# Altium PCB PCB_WIFI远程电脑开机卡.pcbdoc
Units mil, origin at the board's own origin, x right, y up, seen from the top; angles counter-clockwise.
Board outline 3435 x 2337.8 mil, 2 copper layers (Top Layer, Bottom Layer); 36 components, 33 nets, 143 pads, 47 vias.
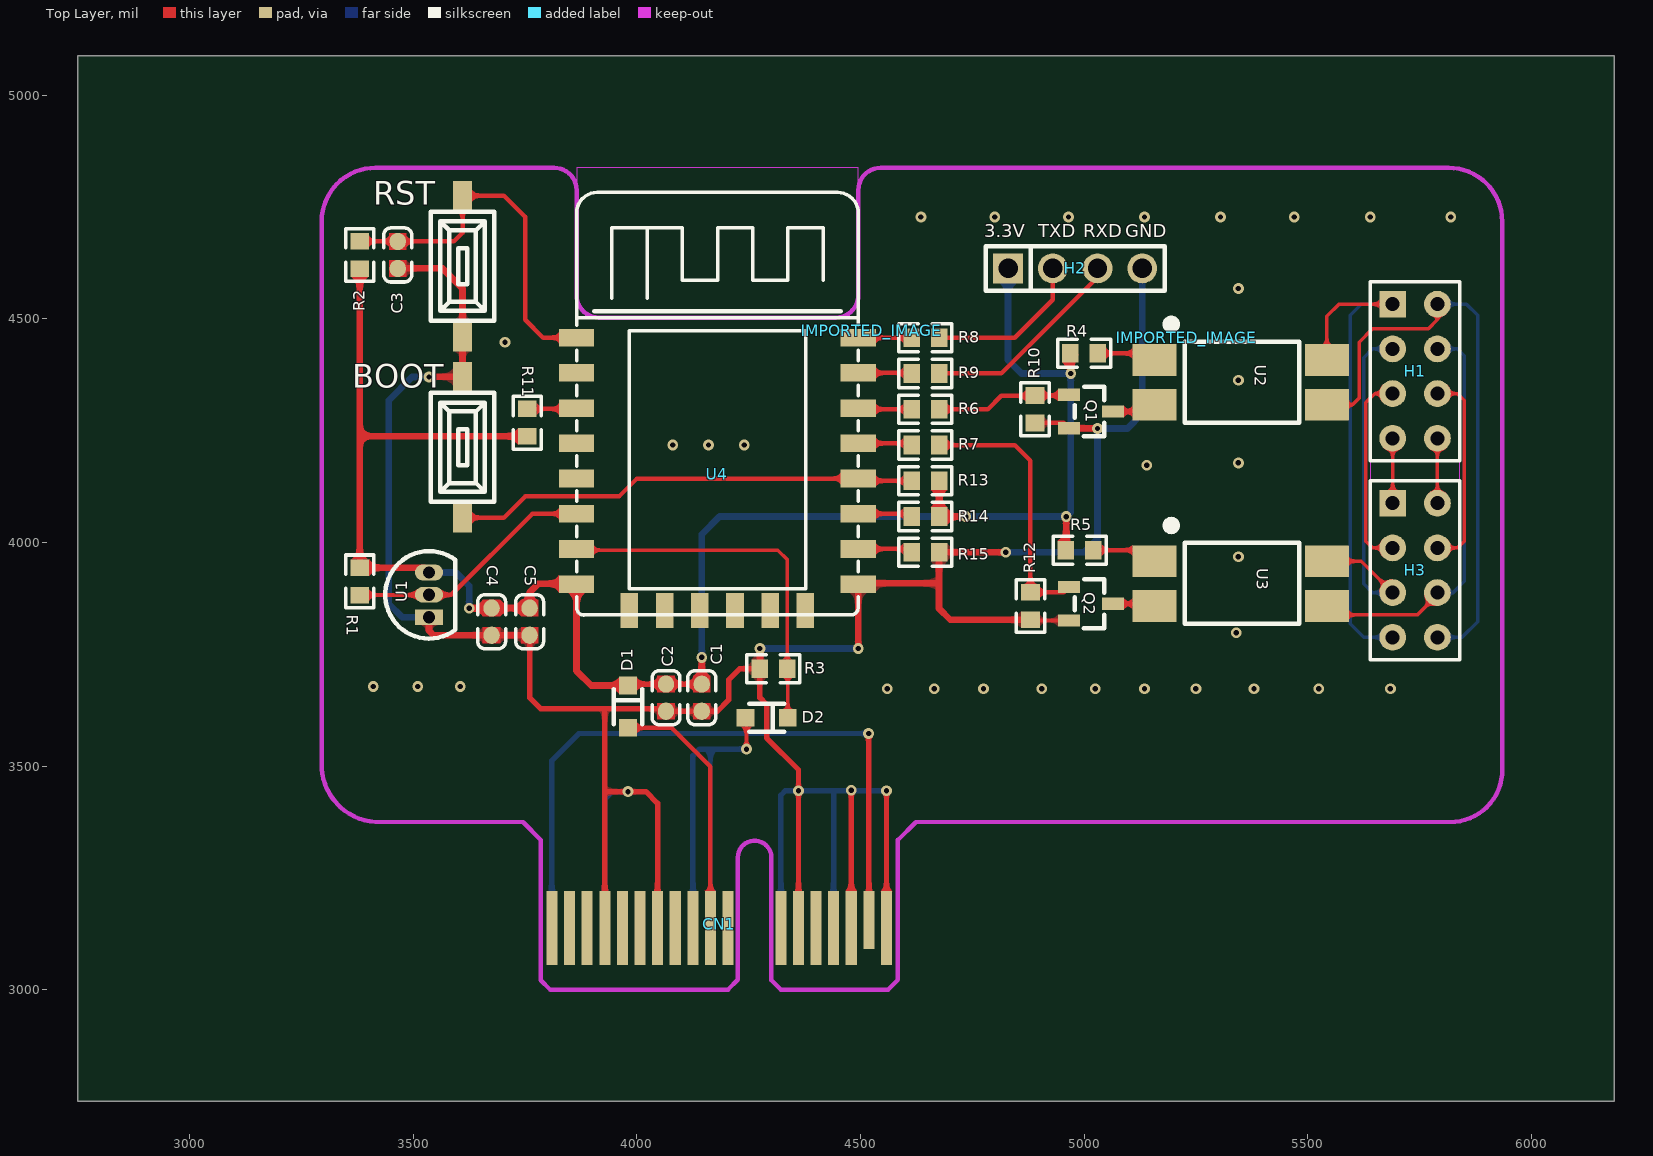
[diagram p0: Top Layer view]
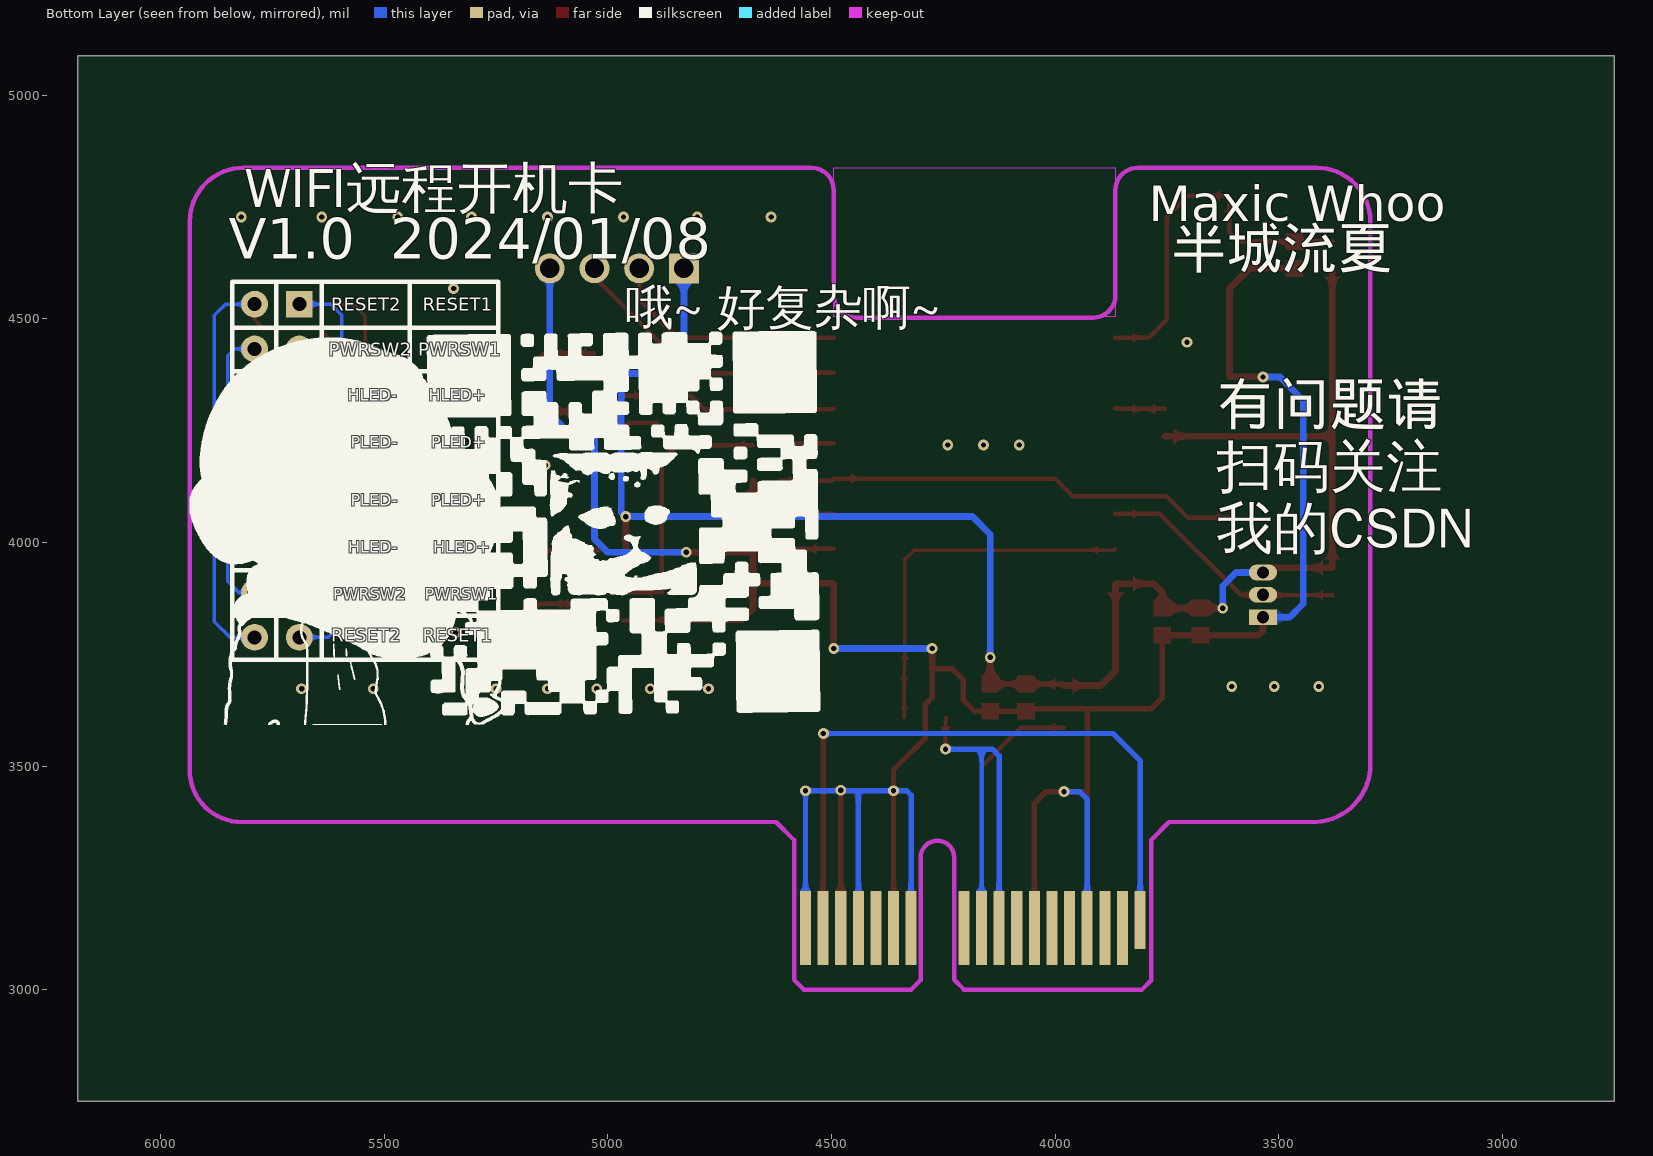
[diagram p1: Bottom Layer view, seen from below]

## Layer stack, top to bottom
Top Layer: signal copper (thickness not stored)
Dielectric: dielectric 12.6, FR-4, Dk 4.8
Bottom Layer: signal copper (thickness not stored)

## Board outline
6185,2750 2750,2750 2750,5087.8 6185,5087.8

## Components (designator, comment, footprint, x,y, rotation, side; value= is the part's Value field where it differs from the comment)
BOOT "BOOT" 轻触开关 3610,4212.8 r90 top
C1 "10uF/10V" "C  0603" 4145,3652.8 r90 top
C2 "100nF/50V" "C  0603" 4065,3652.8 r90 top
C3 "100nF/50V" "C  0603" 3465,4642.8 r90 top
C4 "10uF/25V" "C  0603" 3675,3822.8 r90 top
C5 "100nF/50V" "C  0603" 3760,3822.8 r90 top
CN1 "PCIE-36P" "PCIE 1X" 3810,3137.8 r0 top
D1 "CUS10S30" SOD-323 3980,3632.8 r270 top
D2 "CUS10S30" SOD-323 4290,3607.8 r180 top
H1 "机箱接线端子" 排针排母2*4P 5740,4382.8 r0 top
H2 "A2541WV-4P" HDR-TH_4P-P2.54-V-M 4980,4612.8 r0 top
H3 "主板接线端子" 排针排母2*4P 5740,3937.8 r0 top
IMPORTED_IMAGE "IMPORTED_IMAGE" IMPORTED_IMAGE 5230,4457.8 r0 top
IMPORTED_IMAGE "IMPORTED_IMAGE" IMPORTED_IMAGE 4525,4472.8 r0 top
Q1 "S8050" SOT-23-3 5015,4292.8 r270 top
Q2 "S8050" SOT-23-3 5015,3862.8 r270 top
R1 "10K" "R 0603" 3380,3912.8 r90 top
R2 "10k" "R 0603" 3380,4642.8 r90 top
R3 "4.7K" "R 0603" 4305,3717.8 r180 top
R4 "300R" "R 0603" 5000,4422.8 r0 top
R5 "300R" "R 0603" 4990,3982.8 r0 top
R6 "100R" "R 0603" 4645,4297.8 r0 top
R7 "100R" "R 0603" 4645,4217.8 r0 top
R8 "300R/1%" "R 0603" 4645,4457.8 r180 top
R9 "300R/1%" "R 0603" 4645,4377.8 r180 top
R10 "10K" "R 0603" 4890,4297.8 r270 top
R11 "10k" "R 0603" 3755,4267.8 r270 top
R12 "10K" "R 0603" 4880,3857.8 r270 top
R13 "10k" "R 0603" 4645,4137.8 r0 top
R14 "10k" "R 0603" 4645,4057.8 r180 top
R15 "10k" "R 0603" 4645,3977.8 r180 top
RST "RESET" 轻触开关 3610,4617.8 r270 top
U1 "DS18B20+" TO-92-3_L4.9-W3.7-P1.27-L 3535,3882.8 r90 top
U2 "PS2501-1XSM" SOP-4_L6.5-W4.6-P2.54-LS10.2-BL 5350,4357.8 r270 top
U3 "PS2501-1XSM" SOP-4_L6.5-W4.6-P2.54-LS10.2-BL 5350,3907.8 r270 top
U4 "E-ESP-12F" J-ESP-12F 4175,4267.8 r0 top

## Footprints (in the part's own frame and the unit in brackets; to place one, negate y for a bottom-side part, rotate by r counter-clockwise, add the part's x,y. Pads: shape width x height; smd on the part's side, far side on the other; paste and mask are expansions set on the pad)
"C  0603" [mil]
  oval 38.58x36.61 smd: 1(-30.31,0) 2(30.32,0)
  Top Layer region: -48.62,19.29 -12.01,19.29 -12.01,-19.29 -48.62,-19.29
  Top Layer region: 12.01,19.29 48.62,19.29 48.62,-19.29 12.01,-19.29
  silkscreen extent -60,-31 60,31
HDR-TH_4P-P2.54-V-M [mm]
  rect 1.7x1.7 hole 1.1: 1(-3.81,0)
  round 1.7 hole 1.1: 2(-1.27,0) 3(1.27,0) 4(3.81,0)
  silkscreen extent -5.08,-1.27 5.08,1.27
IMPORTED_IMAGE [mil]
J-ESP-12F [mm]
  rect 2x1 smd: 1(-7.874,4.826) 2(-7.874,2.826) 3(-7.874,0.826) 4(-7.874,-1.174) 5(-7.874,-3.174) 6(-7.874,-5.174) 7(-7.874,-7.174) 8(-7.873,-9.174) 15(8.126,-9.174) 16(8.127,-7.174) 17(8.129,-5.174) 18(8.128,-3.174) 19(8.127,-1.174) 20(8.128,0.826) 21(8.128,2.826) 22(8.128,4.826)
  rect 1x2 smd: 9(-4.872,-10.675) 10(-2.875,-10.674) 11(-0.876,-10.674) 12(1.125,-10.674) 13(3.124,-10.674) 14(5.124,-10.675)
  silkscreen extent -7.87,-10.92 8.13,13.08
"PCIE 1X" [mm]
  rect 0.63x3.3 smd far side: A1(0,0.45)
  rect 0.63x4.2 smd far side: A2(1,0) A3(2,0) A4(3,0) A5(4,0) A6(5,0) A7(6,0) A8(7,0) A9(8,0) A10(9,0) A11(10,0) A12(13,0) A13(14,0) A14(15,0) A15(16,0) A16(17,0) A17(18,0) A18(19,-0.01)
  rect 0.63x4.2 smd: B1(0,0) B2(1,0) B3(2,0) B4(3,0) B5(4,0) B6(5,0) B7(6,0) B8(7,0) B9(8,0) B10(9,0) B11(10,0) B12(13,0) B13(14,0) B14(15,0) B15(16,0) B16(17,0) B18(19,-0.01)
  rect 0.63x3.3 smd: B17(18,0.45)
  Board Outline Layer lines w0.254: -0.635,-2.974 -0.635,4.996 ; -0.635,-2.974 -0.635,4.996 ; -0.635,-2.974 -0.109,-3.5 ; -0.635,-2.974 -0.109,-3.5 ; -0.635,4.996 -1.638,5.997 -0.635,4.996 ; -0.109,-3.5 10,-3.5 ; -0.109,-3.5 10,-3.5 ; 10,-3.5 10.559,-2.941 ; 10,-3.5 10.559,-2.941 ; 10.559,-2.941 10.559,4 10.559,-2.941 ; 12.461,-2.959 12.461,4 12.461,-2.959 ; 12.461,-2.959 13,-3.5 ; 12.461,-2.959 13,-3.5 ; 13,-3.5 19.101,-3.5 ; 13,-3.5 19.101,-3.5 ; 19.101,-3.5 19.649,-2.949 ; 19.101,-3.5 19.649,-2.949 ; 19.649,-2.949 19.649,4.999 ; 19.649,-2.949 19.649,4.999 ; 19.649,4.999 20.66,5.999 19.649,4.999 ; 10.56,4.01 cw(c11.51,4.01) 12.46,4.01 ccw(c11.51,4.01) 10.56,4.01
"R 0603" [mm]
  rect 0.94x1.06 smd: 1(-0.78,0) 2(0.78,0)
  silkscreen extent -1.5,-0.8 1.5,0.8
SOD-323 [mm]
  rect 1x1 smd: 1(-1.2,0) 2(1.2,0)
  silkscreen extent -1,-0.8 1,0.8
SOP-4_L6.5-W4.6-P2.54-LS10.2-BL [mm]
  rect 1.8x2.5 smd: 1(-1.27,-4.9) 2(1.27,-4.9) 3(1.27,4.9) 4(-1.27,4.9)
  silkscreen extent -3.79,-4.42 2.29,3.32
SOT-23-3 [mm]
  rect 0.7x1.25 smd: 1(-0.95,-1.25) 2(0.95,-1.25) 3(0,1.25)
  silkscreen extent -1.4,-0.9 1.4,0.76
TO-92-3_L4.9-W3.7-P1.27-L [mm]
  rect 0.9x1.6 hole 0.7: 1(-1.27,0)
  oval 0.9x1.6 hole 0.7: 2(0,0) 3(1.27,0)
  silkscreen extent -2.48,-1.5 2.48,2.48
排针排母2*4P [mm]
  rect 1.52x1.52 hole 0.8: 1(-1.27,3.81)
  round 1.52 hole 0.8: 2(1.27,3.81) 3(-1.27,1.27) 4(1.27,1.27) 5(-1.27,-1.27) 6(1.27,-1.27) 7(-1.27,-3.81) 8(1.27,-3.81)
  silkscreen extent -2.54,-5.08 2.54,5.08
轻触开关 [mm]
  rect 1.7x1.1 smd: 1(-4,0) 2(4,0)
  silkscreen extent -3.1,-1.8 3.1,1.8

## Via types
v1: diameter 24, hole 12, Top Layer to Bottom Layer, 47 vias

## Nets (pads, with @x,y where several pads share a name; then routed paths per layer and width w, separated by ;. In a path a pad name is that pad's centre, name@x,y a point inside that pad or via, vN(x,y) a via of type N, cw(c..) or ccw(c..) an arc to the next point about the centre after c; other vN are vias at no path point)
3.3AUX: CN1.B10 D1.2 | length 581
  Top Layer w10: D1.2 4077.2,3585.6 4164.3,3498.5 CN1.B10
3.3V: CN1.A9 CN1.A10 D2.2 | length 982.1
  Top Layer w10: D2.2 4245,3605.6 v1(4245,3537.8)
  Bottom Layer w10: CN1.A10 4164.33,3537.8
  Bottom Layer w12: CN1.A9 4124.96,3522.76 4140,3537.8 4164.33,3537.8 v1(4245,3537.8)
3V3: C1.2 C2.2 C4.2 C5.2 D1.1 H2.1 R1.2 R2.1 R4.1 R5.1 R11.2 R13.2 R14.1 U1.3 U4.8 | length 4235
  Top Layer w12: D1.1 3983.1,3683.1 C2.2 C1.2
  Top Layer w15: R2.1 3380,4238 ; U1.3 3524.3,3943.5 R1.2 3380,4238 ; v1(3625,3852.8) C4.2 C5.2 3760,3887.8 3780,3907.8 3863.8,3907.8 U4.8 3865,3712.8 3897.8,3680 D1.1 ; R11.2 3380,4238 ; C1.2 v1(4145,3742.8) ; R13.2 R14.1 v1(4735,4057.8) ; R5.1 4960,3983.5 v1(4960,4057.8) ; R4.1 v1(4970,4377.8)
  Bottom Layer w15: U1.3 3595,3932.8 3625,3902.8 v1(3625,3852.8) ; v1(4145,3742.8) 4145,4017.8 4185,4057.8 v1(4735,4057.8) v1(4960,4057.8) 4970,4067.8 v1(4970,4377.8) 4860,4377.8 4830,4407.8 H2.1
$1N127: R11.1 U4.3 | length 110.7
  Top Layer w10: R11.1 3863.18,4298.51 U4.3
$1N146: R9.2 U4.21 | length 119.8
  Top Layer w10: U4.21 4613.03,4379.06 R9.2
$1N175: R8.2 U4.22 | length 119.3
  Top Layer w10: U4.22 R8.2
$1N180: R14.2 U4.17 | length 121.9
  Top Layer w10: U4.17 4607.99,4064.1 R14.2
$1N181: R15.2 U4.16 | length 122.4
  Top Layer w10: U4.16 4606.73,3985.36 R15.2
$1N314: Q2.1 R7.2 R12.1 | length 603.7
  Top Layer w10: R7.2 4845,4217.8 4880,4182.8 R12.1 4954.11,3888.51 Q2.1
$1N331: Q1.1 R6.2 R10.1 | length 303.5
  Top Layer w10: R6.2 4785,4297.8 4815,4327.8 4889.29,4327.8 R10.1 4964.11,4328.51 Q1.1
$1N466: R4.2 U2.1 | length 132.6
  Top Layer w10: R4.2 5142.09,4422.8 U2.1
$1N467: Q1.3 U2.2 | length 99.1
  Top Layer w10: Q1.3 5142.09,4292.8 U2.2
$1N468: R5.2 U3.1 | length 146.7
  Top Layer w10: R5.2 5132.09,3982.8 U3.1
$1N469: Q2.3 U3.2 | length 95
  Top Layer w10: Q2.3 5152.09,3862.8 U3.2
BOOT: BOOT.1 R13.1 U4.18 | length 1042.6
  Top Layer w10: BOOT.1 3702.5,4055.3 3750,4102.8 3960,4102.8 4000,4142.8 U4.18 4500,4137.8 R13.1
DQ: R1.1 U1.2 U4.6 | length 560.1
  Top Layer w10: R1.1 U1.2 3585,3882.8 3766.3,4064.1 U4.6
ESP-RST: C3.2 R2.2 RST.1 U4.1 | length 841.9
  Top Layer w10: R2.2 C3.2 3590.3,4673.1 3610,4692.8 RST.1 3702.5,4775.3 3750,4727.8 3750,4497.8 3790,4457.8 U4.1
GND: BOOT.2 C1.1 C2.1 C3.1 C4.1 C5.1 CN1.A4 CN1.A12 CN1.A15 CN1.A18 CN1.B4 CN1.B7 CN1.B13 CN1.B16 CN1.B18 H2.4 Q1.2 Q2.2 R3.2 R10.2 R12.2 R15.1 RST.2 U1.1 U4.15 | length 7938.8
  Top Layer w10: R12.2 4881.7,3825.4 Q2.2 ; R10.2 4954.1,4267.1 Q1.2
  Top Layer w12: C5.1 3760,3652.8 3785,3627.8 3928,3627.8 ; CN1.B4 3928,3137.91 3928,3627.8 ; 3928.1,3442.8 v1(3980,3442.8) 4020,3442.8 4046.22,3416.58 CN1.B7 ; CN1.B13 v1(4361.2,3444.8) 4361.2,3491.6 4290,3562.8 4290,3637.8 4275,3652.8 R3.2 4230,3717.8 4205,3692.8 4205,3647.8 4179.7,3622.5 C1.1 C2.1 4059.7,3627.8 3928,3627.8 ; CN1.B16 v1(4479.29,3445.8) ; CN1.B18 v1(4558.03,3444.77)
  Top Layer w15: C3.1 3565,4612.8 3610,4567.8 RST.2 3610,4413.8 BOOT.2 v1(3535,4369.8) ; U1.1 3535,3802.8 3545.3,3792.5 C4.1 C5.1 ; R3.2 v1(4275,3762.8) ; v1(4495,3762.8) U4.15 4497.1,3908.8 4675.7,3908.8 ; v1(4825,3977.8) R15.1 4675.7,3852.1 4700.7,3827.1 R12.2 ; Q1.2 v1(5030,4254.8)
  Bottom Layer w12: CN1.A4 3928.11,3425.91 3945,3442.8 v1(3980,3442.8) ; CN1.A12 4321.8,3434.6 4332,3444.8 v1(4361.2,3444.8) 4439.82,3444.8 ; CN1.A15 4439.92,3444.7 4439.82,3444.8 ; CN1.A18 v1(4558.03,3444.77) 4439.82,3444.8
  Bottom Layer w15: U1.1 3475,3832.8 3445,3862.8 3445,4317.8 3497,4369.8 v1(3535,4369.8) ; v1(4275,3762.8) v1(4495,3762.8) ; v1(4825,3977.8) 5000,3977.8 5030,4007.8 v1(5030,4254.8) 5097,4254.8 5130,4287.8 H2.4
  other v1: 4560,3672.8 4665,3672.8 4775,3672.8 4905,3672.8 5025,3672.8 5135,3672.8 5250,3672.8 5380,3672.8 5525,3672.8 5685,3672.8 3410,3677.8 3510,3677.8 3605,3677.8 5340,3797.8 5345,3967.8 5140,4172.8 5345,4177.8 4080,4217.8 4160,4217.8 4240,4217.8 5345,4362.8 3705,4447.8 5345,4567.8 4635,4727.8 4800,4727.8 4965,4727.8 5135,4727.8 5305,4727.8 5470,4727.8 5640,4727.8 5820,4727.8
GPIO4: R7.1 U4.19 | length 120.9
  Top Layer w10: U4.19 4610.5,4221.6 R7.1
GPIO5: R6.1 U4.20 | length 120.3
  Top Layer w10: U4.20 4497.5,4297.8 R6.1
GPIO13: D2.1 R3.1 U4.7 | length 835.3
  Top Layer w8: U4.7 3867.5,3982.8 4315,3982.8 4335.7,3962.1 R3.1 4337.2,3716.3 D2.1
HLED+: H1.5 H3.3 | length 444.5
  Top Layer w8: H3.3 5645,3987.8 5630,4002.8 5630,4312.8 5650,4332.8 H1.5
HLED-: H1.6 H3.4 | length 447.4
  Top Layer w8: H3.4 5835,3987.8 5850,4002.8 5850,4317.8 5835,4332.8 H1.6
PLED+: H1.7 H3.1 | length 145
  Top Layer w8: H3.1 H1.7
PLED-: H1.8 H3.2 | length 145
  Top Layer w8: H3.2 H1.8
PRSNT: CN1.A1 CN1.B17 | length 1509.7
  Top Layer w12: v1(4518,3572.8) CN1.B17@4518.7,3155.56
  Bottom Layer w12: CN1.A1 3809.58,3155.94 3809.58,3512.38 3870,3572.8 v1@4520,3572.8
PWRSW1: H1.3 H3.5 U3.4 | length 827.7
  Top Layer w8: U3.4 5620,3957.8 H3.5
  Bottom Layer w8: H3.5 5645,3887.8 5625,3907.8 5625,4412.8 5645,4432.8 H1.3
PWRSW2: H1.4 H3.6 U3.3 | length 920.6
  Top Layer w8: U3.3 5562.9,3837.8 5745,3837.8 5790,3882.8 H3.6
  Bottom Layer w8: H3.6 5825,3887.8 5850,3912.8 5850,4417.8 5835,4432.8 H1.4
RESET1: H1.1 H3.7 U2.4 | length 1159
  Top Layer w8: U2.4 5542.9,4505.7 5570,4532.8 H1.1
  Bottom Layer w8: H3.7 5625,3787.8 5595,3817.8 5595,4507.8 5620,4532.8 H1.1
RESET2: H1.2 H3.8 U2.3 | length 1323.9
  Top Layer w8: U2.3 5600,4307.8 5615,4322.8 5615,4447.8 5645,4477.8 5770,4477.8 5790,4497.8 H1.2
  Bottom Layer w8: H3.8 5845,3787.8 5880,3822.8 5880,4507.8 5855,4532.8 H1.2
RXD: H2.3 R9.1 | length 463.4
  Top Layer w10: R9.1 4815,4377.8 5030,4592.8 H2.3
TXD: H2.2 R8.1 | length 359.5
  Top Layer w10: R8.1 4845,4457.8 4930,4542.8 H2.2
"": CN1.A2 CN1.A3 CN1.A5 CN1.A6 CN1.A7 CN1.A8 CN1.A11 CN1.A13 CN1.A14 CN1.A16 CN1.A17 CN1.B1 CN1.B2 CN1.B3 CN1.B5 CN1.B6 CN1.B8 CN1.B9 CN1.B11 CN1.B12 CN1.B14 CN1.B15 U4.2 U4.4 U4.5 U4.9 U4.10 U4.11 U4.12 U4.13 U4.14

## Polygon pours and split planes (outlines as drawn)
GND on Top Layer (solid, remove dead copper, pour order 0): 3295,3287.8 5935,3287.8 5935,4837.8 3295,4837.8
GND on Bottom Layer (solid, remove dead copper, pour order 1): 3295,3287.8 5935,3287.8 5935,4831.25 3295,4831.25

## Keep-outs
Top Layer:
  region net "": 5640,3737.8 5840,3737.8 5840,4582.8 5640,4582.8
  region net "": 3865,4504.47 4495.1,4504.47 4495.1,4837.8 3865,4837.8
Bottom Layer:
  region net "": 5640,3737.8 5840,3737.8 5840,4582.8 5640,4582.8
  region net "": 3865,4504.45 4495.1,4504.45 4495.1,4837.8 3865,4837.8
Board Outline Layer:
  lines w10 net "": 3745.5,3374.8 3415,3374.8 cw(c3423.61,3503.41) 3295,3494.8 3295,4717.8 cw(c3415,4717.8) 3415,4837.8 3815,4837.8 cw(c3815,4787.8) 3865,4787.8 3865,4552.8 ccw(c3915,4552.8) 3915,4502.8 4445,4502.8 ccw(c4445,4552.8) 4495,4552.8 4495,4787.8 cw(c4545,4787.8) 4545,4837.8 5815,4837.8 cw(c5815,4717.8) 5935,4717.8 5934.98,3492.8 cw(c5819.22,3490.57) 5817.98,3374.8 ; 4623.4,3374.79 5819.22,3374.79

## Other copper
Top Layer:
  region net GND: 4367.18,3238.48 4355.18,3238.48 cw(c4226.55,3238.48) 4353.91,3220.48 4368.45,3220.48 cw(c4495.81,3238.48)
  region net GND: 4485.3,3238.48 4473.3,3238.48 cw(c4444.83,3238.48) 4466.89,3220.48 4491.69,3220.48 cw(c4513.84,3238.48)
  region net PRSNT: 4524.56,3238.48 4512.56,3238.48 cw(c4383.96,3238.27) 4511.33,3220.48 4525.86,3220.48 cw(c4653.22,3238.7)
  region net GND: 4564,3238.09 4552,3238.09 cw(c4523.39,3238.09) 4545.63,3220.09 4570.43,3220.09 cw(c4592.4,3238.09)
  region net GND: 3934,3238.48 3922,3238.48 cw(c3793.37,3238.48) 3920.73,3220.48 3935.27,3220.48 cw(c4062.63,3238.48)
  region net GND: 4052.22,3238.48 4040.22,3238.48 cw(c3911.59,3238.48) 4038.95,3220.48 4053.49,3220.48 cw(c4180.85,3238.48)
  region net 3.3AUX: 4169.3,3235.48 4159.3,3235.48 cw(c4140.25,3235.48) 4152,3220.48 4176.6,3220.48 cw(c4188.35,3235.48)
  region net 3.3AUX: 4014.68,3580.6 4014.68,3590.6 cw(c4014.68,3609.35) 3999.68,3598.1 3999.68,3573.1 cw(c4014.68,3561.85)
  region net 3V3: 4017.68,3677.1 4017.68,3689.1 cw(c4017.68,3711.6) 3999.68,3698.1 3999.68,3668.1 cw(c4017.68,3654.6)
  region net 3V3: 3937.82,3687.5 3937.82,3672.5 cw(c3937.82,3644.38) 3960.32,3661.25 3960.32,3698.75 cw(c3937.82,3715.62)
  region net PLED+: 5694,4129.72 5686,4129.72 cw(c5671,4129.72) 5680,4117.72 5700,4117.72 cw(c5709,4129.72)
  region net PLED-: 5794,4127.12 5786,4127.12 5785.94,4125.54 5785.85,4124.59 5785.71,4123.7 5785.52,4122.88 5785.29,4122.13 5785.02,4121.43 5784.71,4120.78 5784.37,4120.19 5783.98,4119.63 5783.56,4119.12 5783.11,4118.64 5782.63,4118.2 5782.11,4117.78 5781.29,4117.18 5780.1,4116.45 5776.02,4114.23 5774.15,4113.13 5772.61,4112.12 5771.43,4111.25 5770.25,4110.27 5769.06,4109.17 5810.95,4109.17 5809.75,4110.27 5808.57,4111.25 5807.01,4112.38 5805.47,4113.37 5801.86,4115.37 5799.6,4116.63 5798.71,4117.18 5797.89,4117.78 5797.37,4118.2 5796.89,4118.64 5796.44,4119.12 5796.02,4119.63 5795.63,4120.19 5795.29,4120.78 5794.98,4121.43 5794.71,4122.13 5794.48,4122.88 5794.29,4123.7 5794.15,4124.59 5794.06,4125.54
  region net HLED+: 5650.68,3991.8 5650.68,3983.8 5652.26,3983.74 5653.21,3983.65 5654.1,3983.51 5654.92,3983.32 5655.67,3983.09 5656.37,3982.82 5657.02,3982.51 5657.61,3982.17 5658.17,3981.78 5658.68,3981.36 5659.16,3980.91 5659.6,3980.43 5660.02,3979.91 5660.62,3979.09 5661.35,3977.9 5663.57,3973.82 5664.67,3971.95 5665.68,3970.41 5666.55,3969.23 5667.53,3968.05 5668.63,3966.86 5668.63,4008.74 5667.53,4007.55 5666.55,4006.37 5665.42,4004.81 5664.43,4003.27 5662.43,3999.66 5661.17,3997.4 5660.62,3996.51 5660.02,3995.69 5659.6,3995.17 5659.16,3994.69 5658.68,3994.24 5658.17,3993.82 5657.61,3993.43 5657.02,3993.09 5656.37,3992.78 5655.67,3992.51 5654.92,3992.28 5654.1,3992.09 5653.21,3991.95 5652.26,3991.86
  region net HLED-: 5829.32,3983.8 5829.32,3991.8 5827.74,3991.86 5826.79,3991.95 5825.9,3992.09 5825.08,3992.28 5824.33,3992.51 5823.63,3992.78 5822.98,3993.09 5822.39,3993.43 5821.83,3993.82 5821.32,3994.24 5820.84,3994.69 5820.4,3995.17 5819.98,3995.69 5819.38,3996.51 5818.65,3997.7 5816.43,4001.78 5815.33,4003.65 5814.32,4005.19 5813.45,4006.37 5812.47,4007.55 5811.37,4008.74 5811.37,3966.86 5812.47,3968.05 5813.45,3969.23 5814.58,3970.79 5815.57,3972.33 5817.57,3975.94 5818.83,3978.2 5819.38,3979.09 5819.98,3979.91 5820.4,3980.43 5820.84,3980.91 5821.32,3981.36 5821.83,3981.78 5822.39,3982.17 5822.98,3982.51 5823.63,3982.82 5824.33,3983.09 5825.08,3983.32 5825.9,3983.51 5826.79,3983.65 5827.74,3983.74
  region net PWRSW1: 5665.02,3918.43 5659.37,3912.78 5660.44,3911.62 5661.05,3910.88 5661.58,3910.15 5662.03,3909.44 5662.4,3908.74 5662.7,3908.06 5662.94,3907.38 5663.12,3906.72 5663.23,3906.05 5663.3,3905.4 5663.32,3904.74 5663.29,3904.08 5663.23,3903.42 5663.06,3902.42 5662.74,3901.05 5661.43,3896.6 5660.88,3894.5 5660.51,3892.69 5660.29,3891.25 5660.14,3889.72 5660.08,3888.1 5689.7,3917.72 5688.08,3917.66 5686.55,3917.51 5684.64,3917.21 5682.86,3916.82 5678.89,3915.68 5676.4,3914.97 5675.38,3914.74 5674.38,3914.57 5673.72,3914.51 5673.06,3914.48 5672.4,3914.5 5671.75,3914.57 5671.08,3914.68 5670.42,3914.86 5669.74,3915.1 5669.06,3915.4 5668.36,3915.77 5667.65,3916.22 5666.92,3916.75 5666.18,3917.36
  region net PWRSW2: 5761.87,3860.32 5767.52,3854.67 5768.76,3855.8 5769.38,3856.28 5770,3856.72 5770.61,3857.1 5771.23,3857.44 5771.85,3857.73 5772.47,3857.98 5773.09,3858.2 5773.72,3858.37 5774.98,3858.63 5776.27,3858.76 5777.58,3858.8 5779.61,3858.71 5785.52,3858.11 5788.83,3857.9 5789.7,3857.88 5760.08,3887.5 5760.17,3886.07 5760.39,3884.48 5761.1,3880.94 5763.09,3872.14 5763.55,3869.26 5763.71,3867.43 5763.74,3865.7 5763.69,3864.88 5763.59,3864.1 5763.45,3863.36 5763.25,3862.65 5763,3862 5762.68,3861.39 5762.31,3860.83
  region net DQ: 3489.18,3887.59 3489.27,3877.59 3490.42,3877.56 3491.64,3877.45 3493.57,3877.17 3495.58,3876.73 3497.63,3876.16 3499.67,3875.47 3501.67,3874.67 3503.58,3873.76 3505.36,3872.77 3506.45,3872.07 3507.46,3871.33 3508.37,3870.57 3508.78,3870.18 3508.55,3895.18 3507.71,3894.39 3506.76,3893.62 3505.72,3892.89 3504.6,3892.19 3502.79,3891.21 3500.87,3890.32 3498.87,3889.54 3496.84,3888.87 3494.82,3888.34 3492.84,3887.94 3490.95,3887.68 3489.76,3887.61
  region net DQ: 3580.78,3877.8 3580.78,3887.8 3579.62,3887.84 3578.39,3887.95 3576.47,3888.24 3574.46,3888.68 3572.43,3889.26 3570.39,3889.96 3568.41,3890.77 3566.51,3891.68 3564.74,3892.68 3563.65,3893.39 3562.65,3894.13 3561.74,3894.91 3561.33,3895.3 3561.33,3870.3 3562.18,3871.08 3563.14,3871.84 3564.18,3872.57 3565.31,3873.26 3567.13,3874.23 3569.06,3875.11 3571.07,3875.89 3573.11,3876.55 3575.14,3877.08 3577.12,3877.47 3579.01,3877.72 3580.21,3877.79
  region net $1N466: 5092.88,4427.8 5092.88,4417.8 cw(c5092.88,4399.05) 5107.88,4410.3 5107.88,4435.3 cw(c5092.88,4446.55)
  region net $1N467: 5092.88,4297.8 5092.88,4287.8 cw(c5092.88,4269.05) 5107.88,4280.3 5107.88,4305.3 cw(c5092.88,4316.55)
  region net RESET2: 5600,4303.8 5600,4311.8 cw(c5600,4319.96) 5592.13,4317.8 5592.13,4297.8 cw(c5600,4295.64)
  region net RESET1: 5546.9,4455.23 5538.9,4455.23 cw(c5523.9,4455.23) 5532.9,4443.23 5552.9,4443.23 cw(c5561.9,4455.23)
  region net 3V3: 3423.37,3936 3423.37,3951 cw(c3423.37,3979.49) 3400.87,3962.02 3400.87,3925.01 cw(c3423.37,3907.48)
  region net 3V3: 3387.5,3984.52 3372.5,3984.52 cw(c3344.38,3984.52) 3361.25,3962.02 3398.75,3962.02 cw(c3415.62,3984.52)
  region net DQ: 3415.87,3877.26 3415.87,3887.26 cw(c3415.78,3905.94) 3400.87,3894.69 3400.87,3869.69 cw(c3415.95,3858.44)
  region net ESP-RST: 3415.87,4668.33 3415.87,4678.33 cw(c3415.95,4697.15) 3400.87,4685.9 3400.87,4660.9 cw(c3415.78,4649.65)
  region net 3V3: 3372.5,4571.09 3387.5,4571.09 cw(c3415.62,4571.09) 3398.75,4593.59 3361.25,4593.59 cw(c3344.38,4571.09)
  region net 3.3V: 4240,3573.11 4250,3573.11 cw(c4268.75,3573.11) 4257.5,3588.11 4232.5,3588.11 cw(c4221.25,3573.11)
  region net GPIO13: 4341.2,3639.49 4333.2,3639.49 cw(c4318.2,3639.49) 4327.2,3627.49 4347.2,3627.49 cw(c4356.2,3639.49)
  region net RESET1: 5648.08,4536.8 5648.08,4528.8 cw(c5648.08,4513.8) 5660.08,4522.8 5660.08,4542.8 cw(c5648.08,4551.8)
  region net RESET2: 5786,4497.8 5794,4497.8 5794.04,4498.35 5794.14,4498.89 5794.32,4499.41 5794.55,4499.92 5794.85,4500.42 5795.2,4500.9 5795.6,4501.38 5796.05,4501.85 5797.08,4502.75 5798.24,4503.63 5800.2,4504.88 5806.51,4508.38 5808.42,4509.52 5809.55,4510.28 5810.52,4511.04 5810.95,4511.43 5769.06,4511.43 5769.48,4511.04 5770.45,4510.28 5771.58,4509.52 5774.17,4508.01 5779.8,4504.88 5781.76,4503.63 5782.92,4502.75 5783.95,4501.85 5784.4,4501.38 5784.8,4500.9 5785.15,4500.42 5785.45,4499.92 5785.68,4499.41 5785.86,4498.89 5785.96,4498.35
  region net HLED+: 5650.68,4336.8 5650.68,4328.8 5652.26,4328.74 5653.21,4328.65 5654.1,4328.51 5654.92,4328.32 5655.67,4328.09 5656.37,4327.82 5657.02,4327.51 5657.61,4327.17 5658.17,4326.78 5658.68,4326.36 5659.16,4325.91 5659.6,4325.43 5660.02,4324.91 5660.62,4324.09 5661.35,4322.9 5663.57,4318.82 5664.67,4316.95 5665.68,4315.41 5666.55,4314.23 5667.53,4313.05 5668.63,4311.85 5668.63,4353.74 5667.53,4352.55 5666.55,4351.37 5665.42,4349.81 5664.43,4348.27 5662.43,4344.66 5661.17,4342.4 5660.62,4341.51 5660.02,4340.69 5659.6,4340.17 5659.16,4339.69 5658.68,4339.24 5658.17,4338.82 5657.61,4338.43 5657.02,4338.09 5656.37,4337.78 5655.67,4337.51 5654.92,4337.28 5654.1,4337.09 5653.21,4336.95 5652.26,4336.85
  region net HLED-: 5829.32,4328.8 5829.32,4336.8 5827.74,4336.85 5826.79,4336.95 5825.9,4337.09 5825.08,4337.28 5824.33,4337.51 5823.63,4337.78 5822.98,4338.09 5822.39,4338.43 5821.83,4338.82 5821.32,4339.24 5820.84,4339.69 5820.4,4340.17 5819.98,4340.69 5819.38,4341.51 5818.65,4342.7 5816.43,4346.78 5815.33,4348.65 5814.32,4350.19 5813.45,4351.37 5812.47,4352.55 5811.37,4353.74 5811.37,4311.85 5812.47,4313.05 5813.45,4314.23 5814.58,4315.79 5815.57,4317.33 5817.57,4320.94 5818.83,4323.2 5819.38,4324.09 5819.98,4324.91 5820.4,4325.43 5820.84,4325.91 5821.32,4326.36 5821.83,4326.78 5822.39,4327.17 5822.98,4327.51 5823.63,4327.82 5824.33,4328.09 5825.08,4328.32 5825.9,4328.51 5826.79,4328.65 5827.74,4328.74
  region net PLED-: 5786,4193.48 5794,4193.48 5794.06,4195.06 5794.15,4196.01 5794.29,4196.9 5794.48,4197.72 5794.71,4198.47 5794.98,4199.17 5795.29,4199.82 5795.63,4200.41 5796.02,4200.97 5796.44,4201.48 5796.89,4201.96 5797.37,4202.4 5797.89,4202.82 5798.71,4203.42 5799.9,4204.15 5803.98,4206.37 5805.85,4207.47 5807.39,4208.48 5808.57,4209.35 5809.75,4210.33 5810.95,4211.43 5769.06,4211.43 5770.25,4210.33 5771.43,4209.35 5772.99,4208.22 5774.53,4207.23 5778.14,4205.23 5780.4,4203.97 5781.29,4203.42 5782.11,4202.82 5782.63,4202.4 5783.11,4201.96 5783.56,4201.48 5783.98,4200.97 5784.37,4200.41 5784.71,4199.82 5785.02,4199.17 5785.29,4198.47 5785.52,4197.72 5785.71,4196.9 5785.85,4196.01 5785.94,4195.06
  region net PLED+: 5686,4193.48 5694,4193.48 5694.06,4195.06 5694.15,4196.01 5694.29,4196.9 5694.48,4197.72 5694.71,4198.47 5694.98,4199.17 5695.29,4199.82 5695.63,4200.41 5696.02,4200.97 5696.44,4201.48 5696.89,4201.96 5697.37,4202.4 5697.89,4202.82 5698.71,4203.42 5699.9,4204.15 5703.98,4206.37 5705.85,4207.47 5707.39,4208.48 5708.57,4209.35 5709.75,4210.33 5710.95,4211.43 5669.05,4211.43 5670.25,4210.33 5671.43,4209.35 5672.99,4208.22 5674.53,4207.23 5678.14,4205.23 5680.4,4203.97 5681.29,4203.42 5682.11,4202.82 5682.63,4202.4 5683.11,4201.96 5683.56,4201.48 5683.98,4200.97 5684.37,4200.41 5684.71,4199.82 5685.02,4199.17 5685.29,4198.47 5685.52,4197.72 5685.71,4196.9 5685.85,4196.01 5685.94,4195.06
  region net $1N331: 4926.19,4333.51 4926.19,4323.51 cw(c4926.19,4304.09) 4941.19,4316.42 4941.19,4341.01 cw(c4926.19,4352.26)
  region net $1N467: 5103.81,4287.8 5103.81,4297.8 cw(c5103.81,4316.55) 5088.81,4305.3 5088.81,4280.3 cw(c5103.81,4269.05)
  region net $1N469: 5103.81,3857.8 5103.81,3867.8 cw(c5103.81,3886.55) 5088.81,3875.3 5088.81,3850.3 cw(c5103.81,3839.05)
  region net GPIO13: 4333.2,3684.93 4341.2,3684.93 cw(c4356.2,3684.93) 4347.2,3696.93 4327.2,3696.93 cw(c4318.2,3684.93)
  region net GPIO13: 4339.7,3750.67 4331.7,3750.67 cw(c4316.7,3750.67) 4325.7,3738.67 4345.7,3738.67 cw(c4354.7,3750.67)
  region net $1N466: 5064.22,4417.8 5064.22,4427.8 cw(c5064.22,4446.55) 5049.22,4435.3 5049.22,4410.3 cw(c5064.22,4399.05)
  region net 3V3: 4962.47,4379.44 4977.48,4379.44 cw(c5059.04,4380.71) 4987.8,4420.44 4950.87,4401.93 cw(c4934,4378.99)
  region net $1N468: 5054.22,3977.8 5054.22,3987.8 cw(c5054.22,4006.55) 5039.22,3995.3 5039.22,3970.3 cw(c5054.22,3959.05)
  region net 3V3: 4967.5,4026.17 4952.5,4026.17 cw(c4924.38,4026.17) 4941.25,4003.67 4969.08,4003.67 cw(c5128.29,4026.17)
  region net $1N331: 4709.22,4292.8 4709.22,4302.8 cw(c4709.22,4321.55) 4694.22,4310.3 4694.22,4285.3 cw(c4709.22,4274.05)
  region net GPIO5: 4580.79,4302.8 4580.79,4292.8 cw(c4580.79,4274.05) 4595.79,4285.3 4595.79,4310.3 cw(c4580.79,4321.55)
  region net $1N314: 4709.22,4212.8 4709.22,4222.8 cw(c4709.22,4241.55) 4694.22,4230.3 4694.22,4205.3 cw(c4709.22,4194.05)
  region net GPIO4: 4580.79,4226.6 4580.79,4216.6 cw(c4580.79,4197.85) 4595.79,4209.1 4595.79,4234.1 cw(c4580.79,4245.35)
  region net $1N175: 4580.78,4462.8 4580.78,4452.8 cw(c4580.78,4434.05) 4595.78,4445.3 4595.78,4470.3 cw(c4580.78,4481.55)
  region net $1N146: 4580.78,4384.06 4580.78,4374.06 cw(c4580.78,4355.31) 4595.78,4366.56 4595.78,4391.56 cw(c4580.78,4402.81)
  region net $1N331: 4854.13,4332.8 4854.13,4322.8 cw(c4854.13,4304.05) 4869.13,4315.3 4869.13,4340.3 cw(c4854.13,4351.55)
  region net $1N331: 4925.87,4323.51 4925.87,4333.51 cw(c4925.87,4352.26) 4910.87,4341.01 4910.87,4316.01 cw(c4925.87,4304.76)
  region net 3V3: 3711.63,4244.7 3711.63,4229.7 cw(c3711.57,4201.24) 3734.13,4218.58 3734.13,4255.59 cw(c3711.7,4273.25)
  region net $1N127: 3790.87,4293.51 3790.87,4303.51 cw(c3790.87,4322.26) 3775.87,4311.01 3775.87,4286.01 cw(c3790.87,4274.76)
  region net $1N314: 4885,3922.01 4875,3922.01 cw(c4856.25,3922.01) 4867.5,3907.01 4892.5,3907.01 cw(c4903.75,3922.01)
  region net $1N314: 4915.87,3883.51 4915.87,3893.51 cw(c4915.87,3912.26) 4900.87,3901.01 4900.87,3876.01 cw(c4915.87,3864.76)
  region net 3V3: 4668.2,4094.43 4683.2,4094.43 cw(c4711.78,4094.43) 4694.16,4116.93 4657.24,4116.93 cw(c4639.62,4094.43)
  region net BOOT: 4580.79,4142.8 4580.79,4132.8 cw(c4580.79,4114.05) 4595.79,4125.3 4595.79,4150.3 cw(c4580.79,4161.55)
  region net $1N180: 4580.78,4069.1 4580.78,4059.1 cw(c4580.78,4040.35) 4595.78,4051.6 4595.78,4076.6 cw(c4580.78,4087.85)
  region net 3V3: 4716.71,4050.3 4716.71,4065.3 cw(c4716.71,4093.43) 4694.21,4076.55 4694.21,4039.05 cw(c4716.71,4022.18)
  region net 3V3: 4683.2,4101.17 4668.2,4101.17 cw(c4639.68,4101.17) 4657.2,4078.67 4694.21,4078.67 cw(c4711.69,4101.17)
  region net $1N181: 4580.78,3990.36 4580.78,3980.36 cw(c4580.78,3961.61) 4595.78,3972.86 4595.78,3997.86 cw(c4580.78,4009.11)
  region net $1N468: 5092.88,3987.8 5092.88,3977.8 cw(c5092.88,3959.05) 5107.88,3970.3 5107.88,3993.23 cw(c5092.88,4011.22)
  region net $1N469: 5092.88,3867.8 5092.88,3857.8 cw(c5092.88,3839.05) 5107.88,3850.3 5107.88,3875.3 cw(c5092.88,3886.55)
  region net PWRSW2: 5604.13,3833.8 5604.13,3841.8 cw(c5604.13,3856.8) 5592.13,3847.8 5592.13,3827.8 cw(c5604.13,3818.8)
  region net PWRSW1: 5604.13,3953.8 5604.13,3961.8 cw(c5604.13,3976.8) 5592.13,3967.8 5592.13,3947.8 cw(c5604.13,3938.8)
  region net $1N175: 4549.37,4452.8 4549.37,4462.8 cw(c4549.37,4481.55) 4534.37,4470.3 4534.37,4445.3 cw(c4549.37,4434.05)
  region net $1N146: 4549.36,4374.06 4549.36,4384.06 cw(c4549.36,4402.81) 4534.36,4391.56 4534.36,4366.56 cw(c4549.36,4355.31)
  region net GPIO5: 4549.37,4292.8 4549.37,4302.8 cw(c4549.37,4321.55) 4534.37,4310.3 4534.37,4285.3 cw(c4549.37,4274.05)
  region net GPIO4: 4549.34,4216.6 4549.34,4226.6 cw(c4549.34,4245.35) 4534.34,4234.1 4534.34,4209.1 cw(c4549.34,4197.85)
  region net BOOT: 4549.37,4132.8 4549.37,4142.8 cw(c4549.37,4161.55) 4534.37,4150.3 4534.37,4125.3 cw(c4549.37,4114.05)
  region net BOOT: 4440.63,4147.8 4440.63,4137.8 cw(c4440.63,4119.05) 4455.63,4130.3 4455.63,4155.3 cw(c4440.63,4166.55)
  region net $1N180: 4549.4,4059.1 4549.4,4069.1 cw(c4549.4,4087.85) 4534.4,4076.6 4534.4,4051.6 cw(c4549.4,4040.35)
  region net $1N181: 4549.35,3980.36 4549.35,3990.36 cw(c4549.35,4009.11) 4534.35,3997.86 4534.35,3972.86 cw(c4549.35,3961.61)
  region net 3V3: 3803.15,3915.3 3803.15,3900.3 cw(c3803.15,3872.18) 3825.65,3889.05 3825.65,3926.26 cw(c3803.15,3943.88)
  region net 3V3: 3857.5,3864.43 3872.5,3864.43 cw(c3900.62,3864.43) 3883.75,3886.93 3846.25,3886.93 cw(c3829.38,3864.43)
  region net GPIO13: 3916.36,3978.8 3916.36,3986.8 cw(c3916.36,4001.8) 3904.36,3992.8 3904.36,3972.8 cw(c3916.36,3963.8)
  region net DQ: 3810.62,4069.1 3810.62,4059.1 cw(c3810.62,4040.35) 3825.62,4051.6 3825.62,4076.6 cw(c3810.62,4087.85)
  region net $1N127: 3810.62,4303.51 3810.62,4293.51 cw(c3810.62,4274.76) 3825.62,4286.01 3825.62,4311.01 cw(c3810.62,4322.26)
  region net ESP-RST: 3810.62,4462.8 3810.62,4452.8 cw(c3810.62,4434.05) 3825.62,4445.3 3825.62,4470.3 cw(c3810.62,4481.55)
  region net BOOT: 3646.65,4050.3 3646.65,4060.3 cw(c3646.65,4079.05) 3631.65,4067.8 3631.65,4042.8 cw(c3646.65,4031.55)
  region net ESP-RST: 3605,4726.82 3615,4726.82 cw(c3633.75,4726.82) 3622.5,4741.82 3597.5,4741.82 cw(c3586.25,4726.82)
  region net ESP-RST: 3646.65,4770.3 3646.65,4780.3 cw(c3646.65,4799.05) 3631.65,4787.8 3631.65,4762.8 cw(c3646.65,4751.55)
  region net 3V3: 4107.71,3689.1 4107.71,3677.1 cw(c4107.71,3654.6) 4125.71,3668.1 4125.71,3698.1 cw(c4107.71,3711.6)
  region net 3V3: 4152.5,3723.92 4137.5,3723.92 cw(c4109.38,3723.92) 4126.25,3701.42 4163.75,3701.42 cw(c4180.62,3723.92)
  region net 3V3: 4027.71,3689.1 4027.71,3677.1 cw(c4027.71,3654.6) 4045.71,3668.1 4045.71,3698.1 cw(c4027.71,3711.6)
  region net 3V3: 4102.29,3677.1 4102.29,3689.1 cw(c4102.29,3711.6) 4084.29,3698.1 4084.29,3668.1 cw(c4102.29,3654.6)
  region net ESP-RST: 3499.29,4668.1 3499.29,4678.1 cw(c3499.29,4696.85) 3484.29,4685.6 3484.29,4660.6 cw(c3499.29,4649.35)
  region net ESP-RST: 3430.71,4678.26 3430.71,4668.26 cw(c3430.62,4649.44) 3445.71,4660.69 3445.71,4685.69 cw(c3430.8,4696.94)
  region net 3V3: 3633.21,3860.35 3633.21,3845.35 cw(c3633.38,3816.43) 3655.71,3834.81 3655.71,3871.42 cw(c3633.04,3889.1)
  region net 3V3: 3716.79,3845.6 3716.79,3860.6 cw(c3716.79,3889.67) 3694.29,3871.26 3694.29,3834.94 cw(c3716.79,3816.53)
  region net 3V3: 3718.21,3860.6 3718.21,3845.6 cw(c3718.21,3816.75) 3740.71,3834.81 3740.71,3871.42 cw(c3718.21,3889.4)
  region net 3V3: 3767.5,3887.8 3752.5,3887.8 cw(c3734.95,3887.8) 3741.25,3871.42 3778.75,3871.42 cw(c3785.05,3887.8)
  region net 3V3: 3640.81,3845.39 3640.72,3860.39 3639.6,3860.33 3637.64,3860.07 3636.77,3859.97 3636.35,3859.97 3635.94,3859.99 3635.54,3860.05 3635.14,3860.17 3634.74,3860.34 3634.34,3860.57 3633.93,3860.87 3633.52,3861.25 3633.62,3844.45 3634.03,3844.84 3634.43,3845.14 3634.83,3845.38 3635.23,3845.55 3635.63,3845.67 3636.03,3845.74 3636.44,3845.77 3636.86,3845.77 3637.73,3845.69 3639.69,3845.44
  region net 3.3V: 4250,3553.57 4240,3553.57 4239.92,3552.65 4239.71,3551.67 4239.37,3550.68 4238.94,3549.7 4238.42,3548.75 4237.85,3547.86 4237.23,3547.06 4236.6,3546.37 4253.4,3546.37 4252.77,3547.06 4252.15,3547.86 4251.58,3548.75 4251.06,3549.7 4250.63,3550.68 4250.29,3551.67 4250.08,3552.65
  region net 3V3: 4977.25,4393.68 4962.26,4393.45 4962.33,4392.33 4962.61,4390.37 4962.71,4389.5 4962.73,4389.08 4962.71,4388.67 4962.64,4388.27 4962.53,4387.87 4962.37,4387.47 4962.14,4387.06 4961.84,4386.65 4961.47,4386.24 4978.27,4386.5 4977.88,4386.9 4977.57,4387.3 4977.33,4387.7 4977.15,4388.1 4977.03,4388.49 4976.95,4388.9 4976.92,4389.31 4976.92,4389.72 4976.99,4390.6 4977.22,4392.56
  region net 3V3: 4719.23,4065.3 4719.23,4050.3 4720.36,4050.35 4722.31,4050.61 4723.19,4050.7 4723.6,4050.7 4724.01,4050.68 4724.42,4050.61 4724.82,4050.49 4725.22,4050.32 4725.62,4050.09 4726.02,4049.78 4726.43,4049.4 4726.43,4066.2 4726.02,4065.82 4725.62,4065.51 4725.22,4065.28 4724.82,4065.11 4724.42,4064.99 4724.01,4064.92 4723.6,4064.9 4723.19,4064.9 4722.31,4064.99 4720.36,4065.25
  region net 3V3: 4952.5,4042.03 4967.5,4042.03 4967.45,4043.16 4967.19,4045.11 4967.1,4045.99 4967.1,4046.4 4967.12,4046.81 4967.19,4047.22 4967.31,4047.62 4967.48,4048.02 4967.71,4048.42 4968.02,4048.82 4968.4,4049.23 4951.6,4049.23 4951.98,4048.82 4952.29,4048.42 4952.52,4048.02 4952.69,4047.62 4952.81,4047.22 4952.88,4046.81 4952.9,4046.4 4952.9,4045.99 4952.81,4045.11 4952.55,4043.16
  region net 3V3: 4137.5,3727.03 4152.5,3727.03 4152.45,3728.16 4152.19,3730.11 4152.1,3730.99 4152.1,3731.4 4152.12,3731.81 4152.19,3732.22 4152.31,3732.62 4152.48,3733.02 4152.71,3733.42 4153.02,3733.82 4153.4,3734.23 4136.6,3734.23 4136.98,3733.82 4137.29,3733.42 4137.52,3733.02 4137.69,3732.62 4137.81,3732.22 4137.88,3731.81 4137.9,3731.4 4137.9,3730.99 4137.81,3730.11 4137.55,3728.16
  region net PRSNT: 4512.03,3557.02 4524.03,3557.04 4524.06,3557.98 4524.15,3558.95 4524.32,3559.94 4524.57,3560.91 4524.9,3561.86 4525.31,3562.74 4525.82,3563.55 4526.41,3564.24 4509.61,3564.22 4510.22,3563.52 4510.72,3562.72 4511.14,3561.83 4511.47,3560.89 4511.72,3559.92 4511.89,3558.93 4511.99,3557.96
  region net 3V3: 3387.5,4215.5 3387.52,4216.2 3387.59,4216.9 3387.69,4217.6 3387.84,4218.29 3388.02,4218.98 3388.24,4219.66 3388.79,4221 3389.47,4222.29 3390.27,4223.53 3391.17,4224.7 3392.18,4225.79 3393.28,4226.79 3394.45,4227.7 3395.69,4228.5 3396.98,4229.17 3398.32,4229.72 3399,4229.93 3399.69,4230.12 3400.38,4230.26 3401.08,4230.36 3401.78,4230.43 3402.48,4230.45 3402.52,4245.45 3401.81,4245.47 3401.11,4245.54 3400.41,4245.64 3399.72,4245.79 3399.03,4245.98 3398.34,4246.2 3397,4246.75 3395.71,4247.43 3394.47,4248.24 3393.29,4249.15 3392.19,4250.16 3391.18,4251.26 3390.27,4252.44 3389.47,4253.68 3388.79,4254.98 3388.24,4256.32 3388.02,4257.01 3387.84,4257.7 3387.69,4258.39 3387.59,4259.09 3387.52,4259.8 3387.5,4260.5
Bottom Layer:
  region net GND: 4327.8,3238.48 4315.8,3238.48 cw(c4187.17,3238.48) 4314.53,3220.48 4329.07,3220.48 cw(c4456.43,3238.48)
  region net GND: 4445.92,3238.48 4433.92,3238.48 cw(c4305.29,3238.48) 4432.65,3220.48 4447.19,3220.48 cw(c4574.55,3238.48)
  region net GND: 4564,3238.08 4552,3238.08 cw(c4523.39,3238.08) 4545.63,3220.08 4570.43,3220.08 cw(c4592.4,3238.08)
  region net PRSNT: 3815.58,3238.48 3803.58,3238.48 cw(c3674.95,3238.48) 3802.32,3220.48 3816.85,3220.48 cw(c3944.21,3238.48)
  region net GND: 3934.11,3238.48 3922.11,3238.48 cw(c3793.48,3238.48) 3920.84,3220.48 3935.38,3220.48 cw(c4062.74,3238.48)
  region net 3.3V: 4130.96,3238.48 4118.96,3238.48 cw(c3990.33,3238.48) 4117.69,3220.48 4132.23,3220.48 cw(c4259.59,3238.48)
  region net 3.3V: 4169.33,3235.48 4159.33,3235.48 cw(c4140.43,3235.48) 4151.93,3220.48 4176.73,3220.48 cw(c4188.23,3235.48)
  region net PWRSW1: 5650.68,3891.8 5650.68,3883.8 5652.26,3883.74 5653.21,3883.65 5654.1,3883.51 5654.92,3883.32 5655.67,3883.09 5656.37,3882.82 5657.02,3882.51 5657.61,3882.17 5658.17,3881.78 5658.68,3881.36 5659.16,3880.91 5659.6,3880.43 5660.02,3879.91 5660.62,3879.09 5661.35,3877.9 5663.57,3873.82 5664.67,3871.95 5665.68,3870.41 5666.55,3869.23 5667.53,3868.05 5668.63,3866.86 5668.63,3908.75 5667.53,3907.55 5666.55,3906.37 5665.42,3904.81 5664.43,3903.27 5662.43,3899.66 5661.17,3897.4 5660.62,3896.51 5660.02,3895.69 5659.6,3895.17 5659.16,3894.69 5658.68,3894.24 5658.17,3893.82 5657.61,3893.43 5657.02,3893.09 5656.37,3892.78 5655.67,3892.51 5654.92,3892.28 5654.1,3892.09 5653.21,3891.95 5652.26,3891.86
  region net PWRSW2: 5825,3883.8 5825,3891.8 5824.45,3891.84 5823.91,3891.94 5823.39,3892.12 5822.88,3892.35 5822.38,3892.65 5821.9,3893 5821.42,3893.4 5820.95,3893.85 5820.05,3894.88 5819.17,3896.04 5817.92,3898 5814.42,3904.31 5813.28,3906.22 5812.52,3907.35 5811.76,3908.32 5811.37,3908.75 5811.37,3866.86 5811.76,3867.28 5812.52,3868.25 5813.28,3869.38 5814.79,3871.97 5817.92,3877.6 5819.17,3879.56 5820.05,3880.72 5820.95,3881.75 5821.42,3882.2 5821.9,3882.6 5822.38,3882.95 5822.88,3883.25 5823.39,3883.48 5823.91,3883.66 5824.45,3883.76
  region net RESET2: 5829.32,3783.8 5829.32,3791.8 5827.74,3791.86 5826.79,3791.95 5825.9,3792.09 5825.08,3792.28 5824.33,3792.51 5823.63,3792.78 5822.98,3793.09 5822.39,3793.43 5821.83,3793.82 5821.32,3794.24 5820.84,3794.69 5820.4,3795.17 5819.98,3795.69 5819.38,3796.51 5818.65,3797.7 5816.43,3801.78 5815.33,3803.65 5814.32,3805.19 5813.45,3806.37 5812.47,3807.55 5811.37,3808.75 5811.37,3766.86 5812.47,3768.05 5813.45,3769.23 5814.58,3770.79 5815.57,3772.33 5817.57,3775.94 5818.83,3778.2 5819.38,3779.09 5819.98,3779.91 5820.4,3780.43 5820.84,3780.91 5821.32,3781.36 5821.83,3781.78 5822.39,3782.17 5822.98,3782.51 5823.63,3782.82 5824.33,3783.09 5825.08,3783.32 5825.9,3783.51 5826.79,3783.65 5827.74,3783.74
  region net RESET1: 5650.68,3791.8 5650.68,3783.8 5652.26,3783.74 5653.21,3783.65 5654.1,3783.51 5654.92,3783.32 5655.67,3783.09 5656.37,3782.82 5657.02,3782.51 5657.61,3782.17 5658.17,3781.78 5658.68,3781.36 5659.16,3780.91 5659.6,3780.43 5660.02,3779.91 5660.62,3779.09 5661.35,3777.9 5663.57,3773.82 5664.67,3771.95 5665.68,3770.41 5666.55,3769.23 5667.53,3768.05 5668.63,3766.86 5668.63,3808.75 5667.53,3807.55 5666.55,3806.37 5665.42,3804.81 5664.43,3803.27 5662.43,3799.66 5661.17,3797.4 5660.62,3796.51 5660.02,3795.69 5659.6,3795.17 5659.16,3794.69 5658.68,3794.24 5658.17,3793.82 5657.61,3793.43 5657.02,3793.09 5656.37,3792.78 5655.67,3792.51 5654.92,3792.28 5654.1,3792.09 5653.21,3791.95 5652.26,3791.86
  region net 3V3: 3587.33,3925.3 3587.33,3940.3 3585.79,3940.25 3584.3,3940.11 3582.42,3939.81 3580.19,3939.31 3575.41,3937.94 3573.61,3937.49 3572.59,3937.29 3571.92,3937.21 3571.27,3937.16 3570.63,3937.16 3570,3937.21 3569.39,3937.31 3568.78,3937.47 3568.48,3937.58 3568.19,3937.7 3567.9,3937.84 3567.61,3937.99 3567.03,3938.36 3566.46,3938.8 3565.9,3939.33 3565.35,3939.94 3564.8,3940.64 3564.26,3941.44 3563.99,3941.88 3563.99,3923.72 3564.53,3924.57 3565.08,3925.32 3565.63,3925.98 3566.18,3926.55 3566.75,3927.03 3567.32,3927.43 3567.61,3927.61 3567.9,3927.76 3568.19,3927.9 3568.48,3928.02 3568.78,3928.13 3569.39,3928.29 3570,3928.39 3570.63,3928.44 3571.27,3928.44 3571.92,3928.39 3572.59,3928.31 3573.61,3928.11 3575.41,3927.66 3580.19,3926.29 3582.42,3925.79 3584.3,3925.49 3585.79,3925.35
  region net RESET1: 5648.08,4536.8 5648.08,4528.8 cw(c5648.08,4513.8) 5660.08,4522.8 5660.08,4542.8 cw(c5648.08,4551.8)
  region net RESET2: 5829.32,4528.8 5829.32,4536.8 5827.74,4536.85 5826.79,4536.95 5825.9,4537.09 5825.08,4537.28 5824.33,4537.51 5823.63,4537.78 5822.98,4538.09 5822.39,4538.43 5821.83,4538.82 5821.32,4539.24 5820.84,4539.69 5820.4,4540.17 5819.98,4540.69 5819.38,4541.51 5818.65,4542.7 5816.43,4546.78 5815.33,4548.65 5814.32,4550.19 5813.45,4551.37 5812.47,4552.55 5811.37,4553.75 5811.37,4511.85 5812.47,4513.05 5813.45,4514.23 5814.58,4515.79 5815.57,4517.33 5817.57,4520.94 5818.83,4523.2 5819.38,4524.09 5819.98,4524.91 5820.4,4525.43 5820.84,4525.91 5821.32,4526.36 5821.83,4526.78 5822.39,4527.17 5822.98,4527.51 5823.63,4527.82 5824.33,4528.09 5825.08,4528.32 5825.9,4528.51 5826.79,4528.65 5827.74,4528.74
  region net PWRSW1: 5650.68,4436.8 5650.68,4428.8 5652.26,4428.74 5653.21,4428.65 5654.1,4428.51 5654.92,4428.32 5655.67,4428.09 5656.37,4427.82 5657.02,4427.51 5657.61,4427.17 5658.17,4426.78 5658.68,4426.36 5659.16,4425.91 5659.6,4425.43 5660.02,4424.91 5660.62,4424.09 5661.35,4422.9 5663.57,4418.82 5664.67,4416.95 5665.68,4415.41 5666.55,4414.23 5667.53,4413.05 5668.63,4411.85 5668.63,4453.74 5667.53,4452.55 5666.55,4451.37 5665.42,4449.81 5664.43,4448.27 5662.43,4444.66 5661.17,4442.4 5660.62,4441.51 5660.02,4440.69 5659.6,4440.17 5659.16,4439.69 5658.68,4439.24 5658.17,4438.82 5657.61,4438.43 5657.02,4438.09 5656.37,4437.78 5655.67,4437.51 5654.92,4437.28 5654.1,4437.09 5653.21,4436.95 5652.26,4436.85
  region net PWRSW2: 5829.32,4428.8 5829.32,4436.8 5827.74,4436.85 5826.79,4436.95 5825.9,4437.09 5825.08,4437.28 5824.33,4437.51 5823.63,4437.78 5822.98,4438.09 5822.39,4438.43 5821.83,4438.82 5821.32,4439.24 5820.84,4439.69 5820.4,4440.17 5819.98,4440.69 5819.38,4441.51 5818.65,4442.7 5816.43,4446.78 5815.33,4448.65 5814.32,4450.19 5813.45,4451.37 5812.47,4452.55 5811.37,4453.74 5811.37,4411.85 5812.47,4413.05 5813.45,4414.23 5814.58,4415.79 5815.57,4417.33 5817.57,4420.94 5818.83,4423.2 5819.38,4424.09 5819.98,4424.91 5820.4,4425.43 5820.84,4425.91 5821.32,4426.36 5821.83,4426.78 5822.39,4427.17 5822.98,4427.51 5823.63,4427.82 5824.33,4428.09 5825.08,4428.32 5825.9,4428.51 5826.79,4428.65 5827.74,4428.74
  region net 3V3: 4822.5,4556.84 4837.5,4556.84 cw(c4865.62,4556.84) 4848.75,4579.34 4811.25,4579.34 cw(c4794.38,4556.84)
  region net 3V3: 3632.5,3868.57 3617.5,3868.57 3617.55,3867.44 3617.81,3865.49 3617.9,3864.61 3617.9,3864.2 3617.88,3863.79 3617.81,3863.38 3617.69,3862.98 3617.52,3862.58 3617.29,3862.18 3616.98,3861.78 3616.6,3861.37 3633.4,3861.37 3633.02,3861.78 3632.71,3862.18 3632.48,3862.58 3632.31,3862.98 3632.19,3863.38 3632.12,3863.79 3632.1,3864.2 3632.1,3864.61 3632.19,3865.49 3632.45,3867.44
  region net 3.3V: 4229.23,3543.8 4229.23,3531.8 4230.17,3531.77 4231.14,3531.67 4232.13,3531.5 4233.1,3531.25 4234.05,3530.92 4234.93,3530.51 4235.73,3530 4236.43,3529.4 4236.43,3546.2 4235.73,3545.6 4234.93,3545.09 4234.05,3544.68 4233.1,3544.35 4232.13,3544.1 4231.14,3543.93 4230.17,3543.83
  region net 3V3: 4954.23,4385.3 4954.23,4370.3 4955.36,4370.35 4957.31,4370.61 4958.19,4370.7 4958.6,4370.7 4959.01,4370.68 4959.42,4370.61 4959.82,4370.49 4960.22,4370.32 4960.62,4370.09 4961.02,4369.78 4961.43,4369.4 4961.43,4386.2 4961.02,4385.82 4960.62,4385.51 4960.22,4385.28 4959.82,4385.11 4959.42,4384.99 4959.01,4384.92 4958.6,4384.9 4958.19,4384.9 4957.31,4384.99 4955.36,4385.25
  region net 3V3: 4962.5,4362.03 4977.5,4362.03 4977.45,4363.16 4977.19,4365.11 4977.1,4365.99 4977.1,4366.4 4977.12,4366.81 4977.19,4367.22 4977.31,4367.62 4977.48,4368.02 4977.71,4368.42 4978.02,4368.82 4978.4,4369.23 4961.6,4369.23 4961.98,4368.82 4962.29,4368.42 4962.52,4368.02 4962.69,4367.62 4962.81,4367.22 4962.88,4366.81 4962.9,4366.4 4962.9,4365.99 4962.81,4365.11 4962.55,4363.16
  region net 3V3: 4719.23,4065.3 4719.23,4050.3 4720.36,4050.35 4722.31,4050.61 4723.19,4050.7 4723.6,4050.7 4724.01,4050.68 4724.42,4050.61 4724.82,4050.49 4725.22,4050.32 4725.62,4050.09 4726.02,4049.78 4726.43,4049.4 4726.43,4066.2 4726.02,4065.82 4725.62,4065.51 4725.22,4065.28 4724.82,4065.11 4724.42,4064.99 4724.01,4064.92 4723.6,4064.9 4723.19,4064.9 4722.31,4064.99 4720.36,4065.25
  region net 3V3: 4750.77,4050.3 4750.77,4065.3 4749.64,4065.25 4747.69,4064.99 4746.81,4064.9 4746.4,4064.9 4745.99,4064.92 4745.58,4064.99 4745.18,4065.11 4744.78,4065.28 4744.38,4065.51 4743.98,4065.82 4743.57,4066.2 4743.57,4049.4 4743.98,4049.78 4744.38,4050.09 4744.78,4050.32 4745.18,4050.49 4745.58,4050.61 4745.99,4050.68 4746.4,4050.7 4746.81,4050.7 4747.69,4050.61 4749.64,4050.35
  region net 3V3: 4944.23,4065.3 4944.23,4050.3 4945.36,4050.35 4947.31,4050.61 4948.19,4050.7 4948.6,4050.7 4949.01,4050.68 4949.42,4050.61 4949.82,4050.49 4950.22,4050.32 4950.62,4050.09 4951.02,4049.78 4951.43,4049.4 4951.43,4066.2 4951.02,4065.82 4950.62,4065.51 4950.22,4065.28 4949.82,4065.11 4949.42,4064.99 4949.01,4064.92 4948.6,4064.9 4948.19,4064.9 4947.31,4064.99 4945.36,4065.25
  region net 3V3: 4975.3,4062.5 4964.7,4073.1 4963.14,4071.32 4962.67,4070.82 4962.16,4070.4 4961.59,4070.07 4960.92,4069.87 4960.12,4069.8 4972,4057.92 4972.07,4058.72 4972.27,4059.39 4972.6,4059.96 4973.02,4060.47 4973.52,4060.94
  region net 3V3: 4152.5,3758.57 4137.5,3758.57 4137.55,3757.44 4137.81,3755.49 4137.9,3754.61 4137.9,3754.2 4137.88,3753.79 4137.81,3753.38 4137.69,3752.98 4137.52,3752.58 4137.29,3752.18 4136.98,3751.78 4136.6,3751.37 4153.4,3751.37 4153.02,3751.78 4152.71,3752.18 4152.48,3752.58 4152.31,3752.98 4152.19,3753.38 4152.12,3753.79 4152.1,3754.2 4152.1,3754.61 4152.19,3755.49 4152.45,3757.44
  region net PRSNT: 4502.23,3578.8 4502.23,3566.8 4503.17,3566.77 4504.14,3566.67 4505.13,3566.5 4506.1,3566.25 4507.05,3565.92 4507.93,3565.51 4508.73,3565 4509.43,3564.4 4509.43,3581.2 4508.73,3580.6 4507.93,3580.09 4507.05,3579.68 4506.1,3579.35 4505.13,3579.1 4504.14,3578.93 4503.17,3578.83
  region net 3V3: 4955,4385.3 4947.5,4370.3 ccw(c4947.5,4421.43) 4962.5,4372.55 4964.64,4383.05 ccw(c4955,4363.51)
  region net 3V3: 4964.7,4073.1 4963.37,4071.89 4961.96,4070.8 4960.47,4069.84 4958.92,4068.99 4957.3,4068.26 4955.64,4067.62 4953.92,4067.08 4951.27,4066.44 4948.56,4065.96 4944.88,4065.56 4940.25,4065.33 4937.5,4065.3 4937.5,4050.3 4952.5,4057.8 4975.3,4062.5
  region net 3.3V: 4169.33,3510.2 4159.33,3510.2 ccw(c4116.21,3510.2) 4153.53,3531.8 4175.13,3531.8 ccw(c4212.45,3510.2)

## Silkscreen, mask and mechanical layers (free items; w line width, h text height)
Top Silkscreen Layer:
  text "3.3V" at 4776.22,4682.79 h29.2
  text "TXD" at 4897.51,4682.79 h29.2
  text "RXD" at 4997.51,4682.79 h29.2
  text "GND" at 5092.51,4682.79 h29.2
Bottom Silkscreen Layer:
  lines w10 net "": 5245,3836.38 5840,3836.38 ; 5245,3937.34 5840,3937.34 ; 5245,4037.8 5245.77,4037.03 5840,4037.03 ; 5245,4157.8 5247.5,4160.3 5840,4160.3 ; 5245,4284.69 5840,4284.69 ; 5245,4382.74 5840,4382.74 ; 5245,4480.54 5840,4480.54 ; 5443.53,3737.8 5443.53,4582.8 ; 5640,3737.8 5640,4582.8 ; 5741.3,3737.8 5741.3,4582.8 ; 5245,3737.8 5840,3737.8 5840,4582.8 5245,4582.8 5245,3737.8
  text "WIFI远程开机卡" at 5811.46,4749.52 h90.62
  text "Maxic Whoo" at 3790,4717.8 h80
  text "V1.0  2024/01/08" at 5848.04,4634.52 h90.62
  text "半城流夏" at 3740.33,4614.52 h90.62
  text "RESET1" at 5413.66,4517.79 h29.2
  text "RESET2" at 5618.66,4517.79 h29.2
  text "哦~ 好复杂啊~" at 4961.08,4487.43 h79.3
  text "PWRSW1" at 5423.66,4417.79 h29.2
  text "PWRSW2" at 5623.66,4417.79 h29.2
  text "HLED+" at 5400.5,4316.68 h25.96
  text "HLED-" at 5581.93,4316.68 h25.96
  text "PLED+" at 5395.5,4211.68 h25.96
  text "PLED-" at 5575.5,4211.68 h25.96
  text "PLED+" at 5395.5,4081.68 h25.96
  text "PLED-" at 5575.5,4081.68 h25.96
  text "有问题请 /  扫码关注 /  我的CSDN" at 3638.4,3988.04 h91.97
  text "HLED+" at 5390.5,3976.68 h25.96
  text "HLED-" at 5580.5,3976.68 h25.96
  text "PWRSW1" at 5409.36,3871.68 h25.96
  text "PWRSW2" at 5614.36,3871.68 h25.96
  text "RESET1" at 5413.66,3777.79 h29.2
  text "RESET2" at 5618.66,3777.79 h29.2